# EAGLE board Bodacious Jaiks-Snicket (EAGLE 9.7.0)

Size 249.55 x 74.35 mm. Coordinates in mm from the lower left corner, seen from the top.
Outline: 0,0 249.55,0 249.55,74.35 0,74.35 0,0
Copper layers (1*16): Top 0.035mm / dielectric 1.5mm / Bottom 0.035mm
Design rules "default": minimum track width 6mil, minimum drill 0.35mm, track to track 6mil, track to pad 6mil, pad to pad 6mil, via to via 6mil, smd to smd 6mil, copper to edge 40mil, drill to drill 6mil, minimum pad ring 10mil, minimum via ring 8mil, stop-mask expansion 4mil, vias tented up to drill 0mil, thermal gap 10mil

## Footprints (pad centres in the part's own frame; a part is rotated, then mirrored left to right if it is on the bottom)
BATTERY-GENERIC = drill 1.118 pad 3.15 octagon: + 2.54,0; - -2.54,0
CAP-THRU-2.54MM = drill 1.016 pad 1.88: 1 -1.27,0; 2 1.27,0
LEDRD254W60D565H860B_Y = drill 0.981 pad 1.581: 1 -1.27,0; 2 1.27,0
LEDRD254W60D565H860B = drill 0.981 pad 1.581: 1 -1.27,0; 2 1.27,0
LEDRD254W60D565H860B_B = drill 0.981 pad 1.581: 1 -1.27,0; 2 1.27,0
MOTOR = drill 1.118 pad 3.15 octagon: + 2.54,0; - -2.54,0
RESAD1016W63L850D250B = drill 0.83 pad 1.43: 1 -5.08,0; 2 5.08,0
HA-06-SM065 = drill 1 pad 1.676: 1 -2.54,-2.54; 2 0,2.54; 3 2.54,-2.54
SWITCH-MOMENTARY-PTH-6.5MM = drill 1.016 pad 1.88: 1 -3.251,2.261; 2 3.251,2.261; 3 -3.251,-2.261; 4 3.251,-2.261
TO92 = drill 0.813 octagon: 1 -1.27,0; 2 0,1.905; 3 1.27,0

## Placement (x,y rotation side)
BAT1  9V  [BATTERY-GENERIC]  8.26,50.88 0 top
C1  10n  [CAP-THRU-2.54MM]  153.83,26.65 0 top
C2  10n  [CAP-THRU-2.54MM]  146.21,26.65 0 top
D2  YELLOW  [LEDRD254W60D565H860B_Y]  181.77,19.03 0 top
D3  RED  [LEDRD254W60D565H860B]  45.86,18.96 0 top
D4  BLUE  [LEDRD254W60D565H860B_B]  125.89,19.03 0 top
MM1  MOTOR_HDR  [MOTOR]  149.9,66.09 0 top
R1  330  [RESAD1016W63L850D250B]  117,24.11 180 top
R2  0.33k  [RESAD1016W63L850D250B]  117,6.33 0 top
R3  0.33k  [RESAD1016W63L850D250B]  183.04,24.11 0 top
R4  0.33k  [RESAD1016W63L850D250B]  183.04,6.33 0 top
R5  330  [RESAD1016W63L850D250B]  52.21,16.42 0 top
R7  100  [RESAD1016W63L850D250B]  188.12,16.49 0 top
R8  100  [RESAD1016W63L850D250B]  132.24,16.49 0 top
RPOT2  20k  [HA-06-SM065]  26.81,26.58 0 top
S1  SWITCH_MOMENTARY  [SWITCH-MOMENTARY-PTH-6.5MM]  215.9,60.07 90 top
S2  SWITCH_MOMENTARY  [SWITCH-MOMENTARY-PTH-6.5MM]  241.3,60.07 90 top
TQ1  NPN  [TO92]  122.08,26.65 0 top
TQ2  NPN  [TO92]  177.96,26.65 0 top
TQ3  NPN  [TO92]  122.08,8.87 0 top
TQ4  NPN  [TO92]  177.96,8.87 0 top

## Library data of the parts
BAT1 C1 C2 MM1 R1-R5 R7 R8 RPOT2 S1 S2 = Tinkercad
D2 = Tinkercad; CATEGORY: Opto-Electronic; SUB-CATEGORY: LED; VALUE: LED_YELLOW
D3 = Tinkercad; CATEGORY: Opto-Electronic; SUB-CATEGORY: LED; VALUE: LED_RED
D4 = Tinkercad; CATEGORY: Opto-Electronic; SUB-CATEGORY: LED; VALUE: LED_BLUE
TQ1-TQ4 = Tinkercad; CATEGORY: Transistor; SUB-CATEGORY: BJT; TYPE: NPN

## Nets
BAT1+: BAT1.+ RPOT2.1 S1.1 S1.2 S2.1 S2.2
BAT1-: BAT1.- C1.2 C2.1 R5.2 R7.2 R8.2 RPOT2.3 TQ3.3 TQ4.3
D2_C: D2.2 R7.1
D3_A: D3.1 RPOT2.2 TQ1.1 TQ2.1
D3_C: D3.2 R5.1
D4_C: D4.2 R8.1
MM1_+: C1.1 D2.1 MM1.+ TQ2.3 TQ4.1
MM1_-: C2.2 D4.1 MM1.- TQ1.3 TQ3.1
S1_3: R2.1 R3.2 S1.3 S1.4
S2_4: R1.2 R4.2 S2.3 S2.4
TQ1_B: R1.1 TQ1.2
TQ2_B: R3.1 TQ2.2
TQ3_B: R2.2 TQ3.2
TQ4_B: R4.1 TQ4.2

## Tracks (layer width: path | path; a pad name or v marks a point on that pad's centre or on a via)
BAT1+  (5 unrouted)
BAT1-  (8 unrouted)
D2_C  (1 unrouted)
D3_A  (3 unrouted)
D3_C  (1 unrouted)
D4_C  (1 unrouted)
MM1_+  (4 unrouted)
MM1_-  (4 unrouted)
S1_3  (3 unrouted)
S2_4  (3 unrouted)
TQ1_B  (1 unrouted)
TQ2_B  (1 unrouted)
TQ3_B  (1 unrouted)
TQ4_B  (1 unrouted)